# Altium PCB snes_exp_bridge.PcbDoc
Units mm, origin at the board's own origin, x right, y up, seen from the top; angles counter-clockwise.
Board outline 72.33 x 68.3 mm, 2 copper layers (Top Layer, Bottom Layer), stack 1.58 mm thick; 4 components, 28 nets, 66 pads, 24 vias.
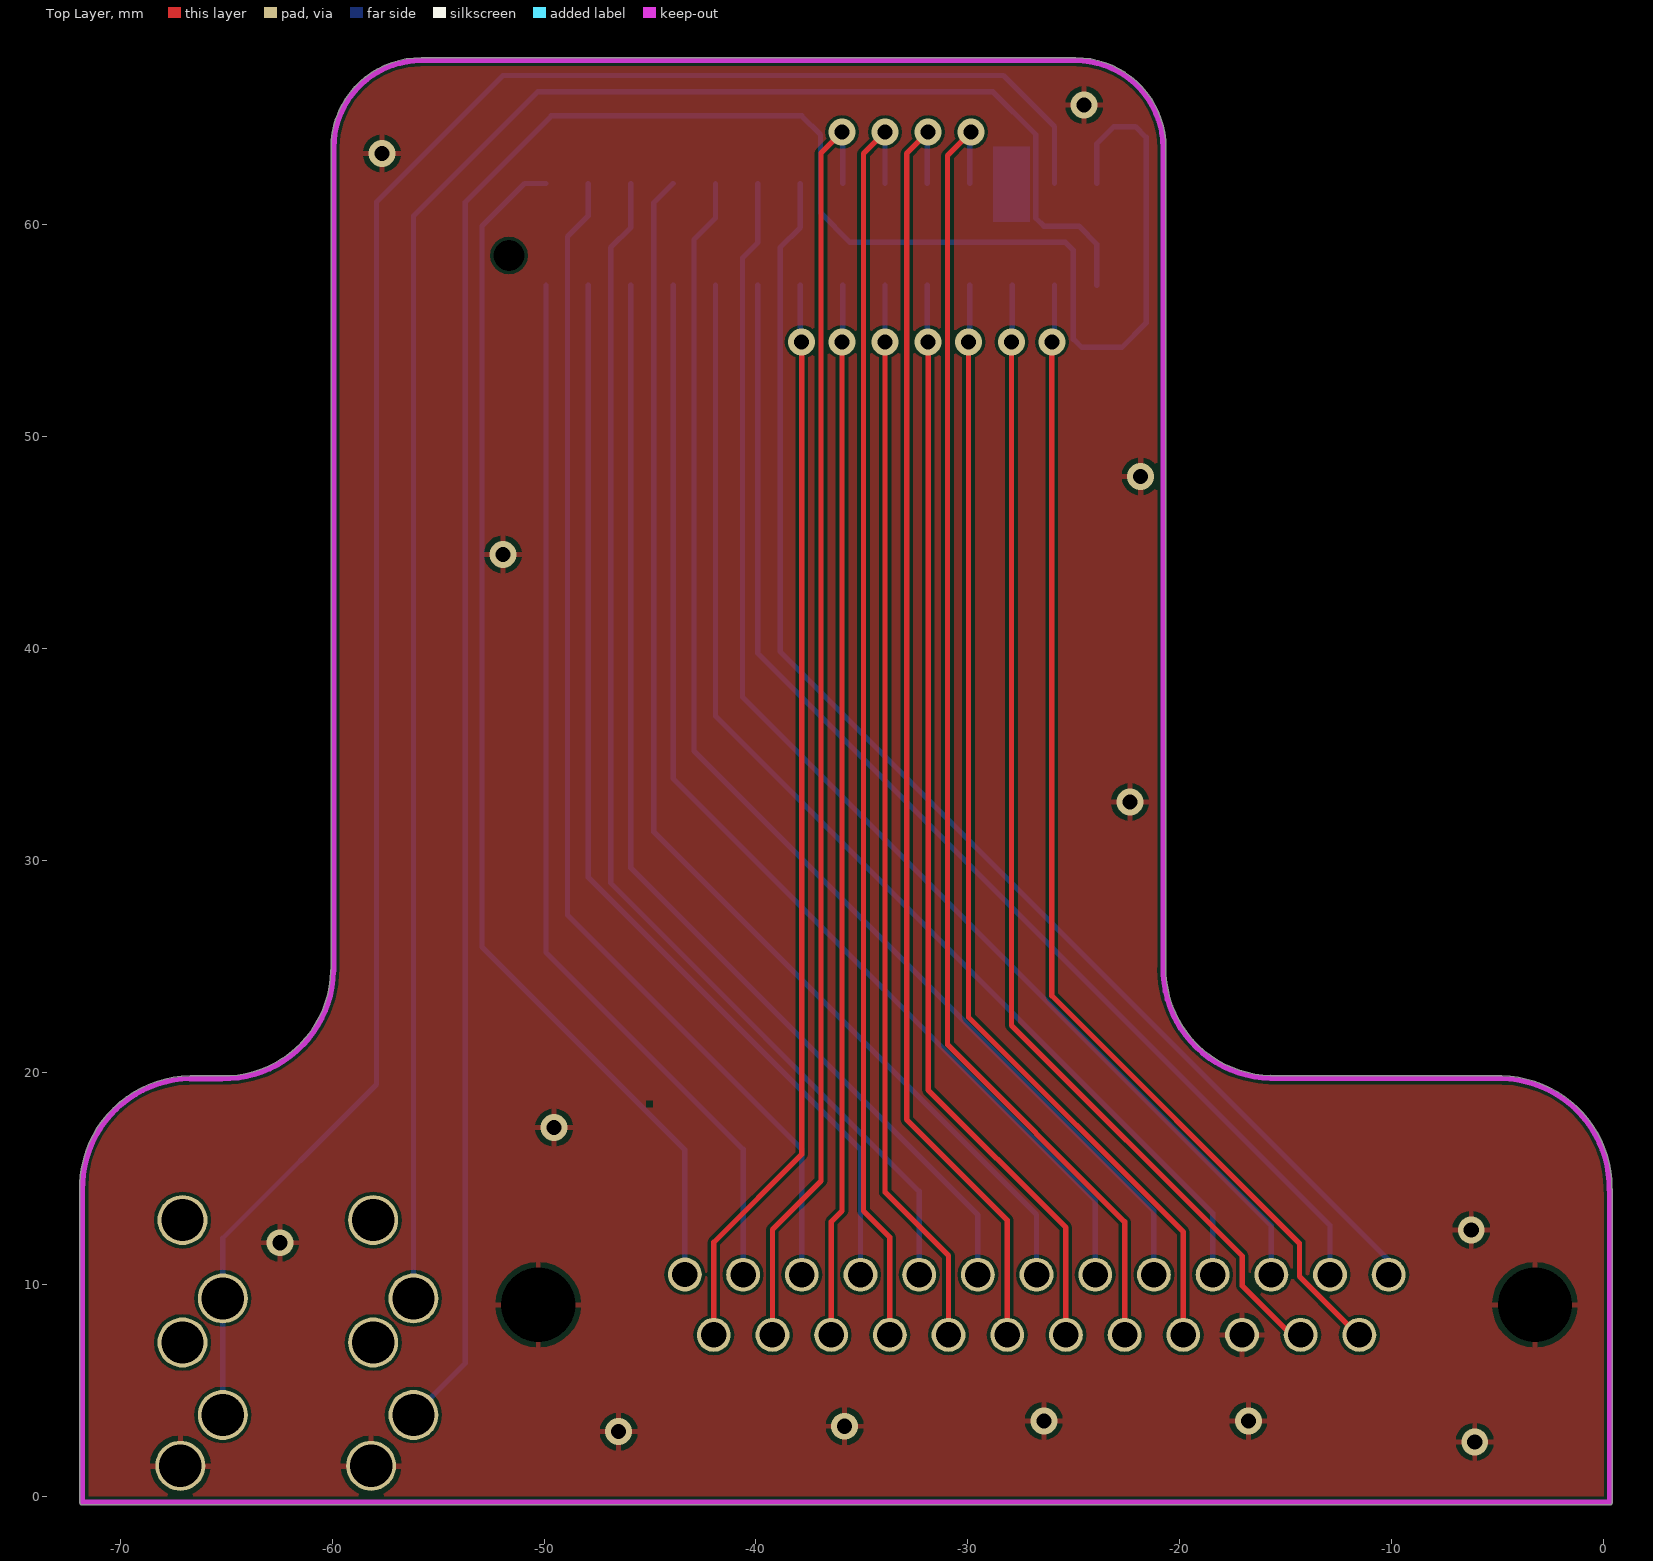
[diagram p0: Top Layer view]
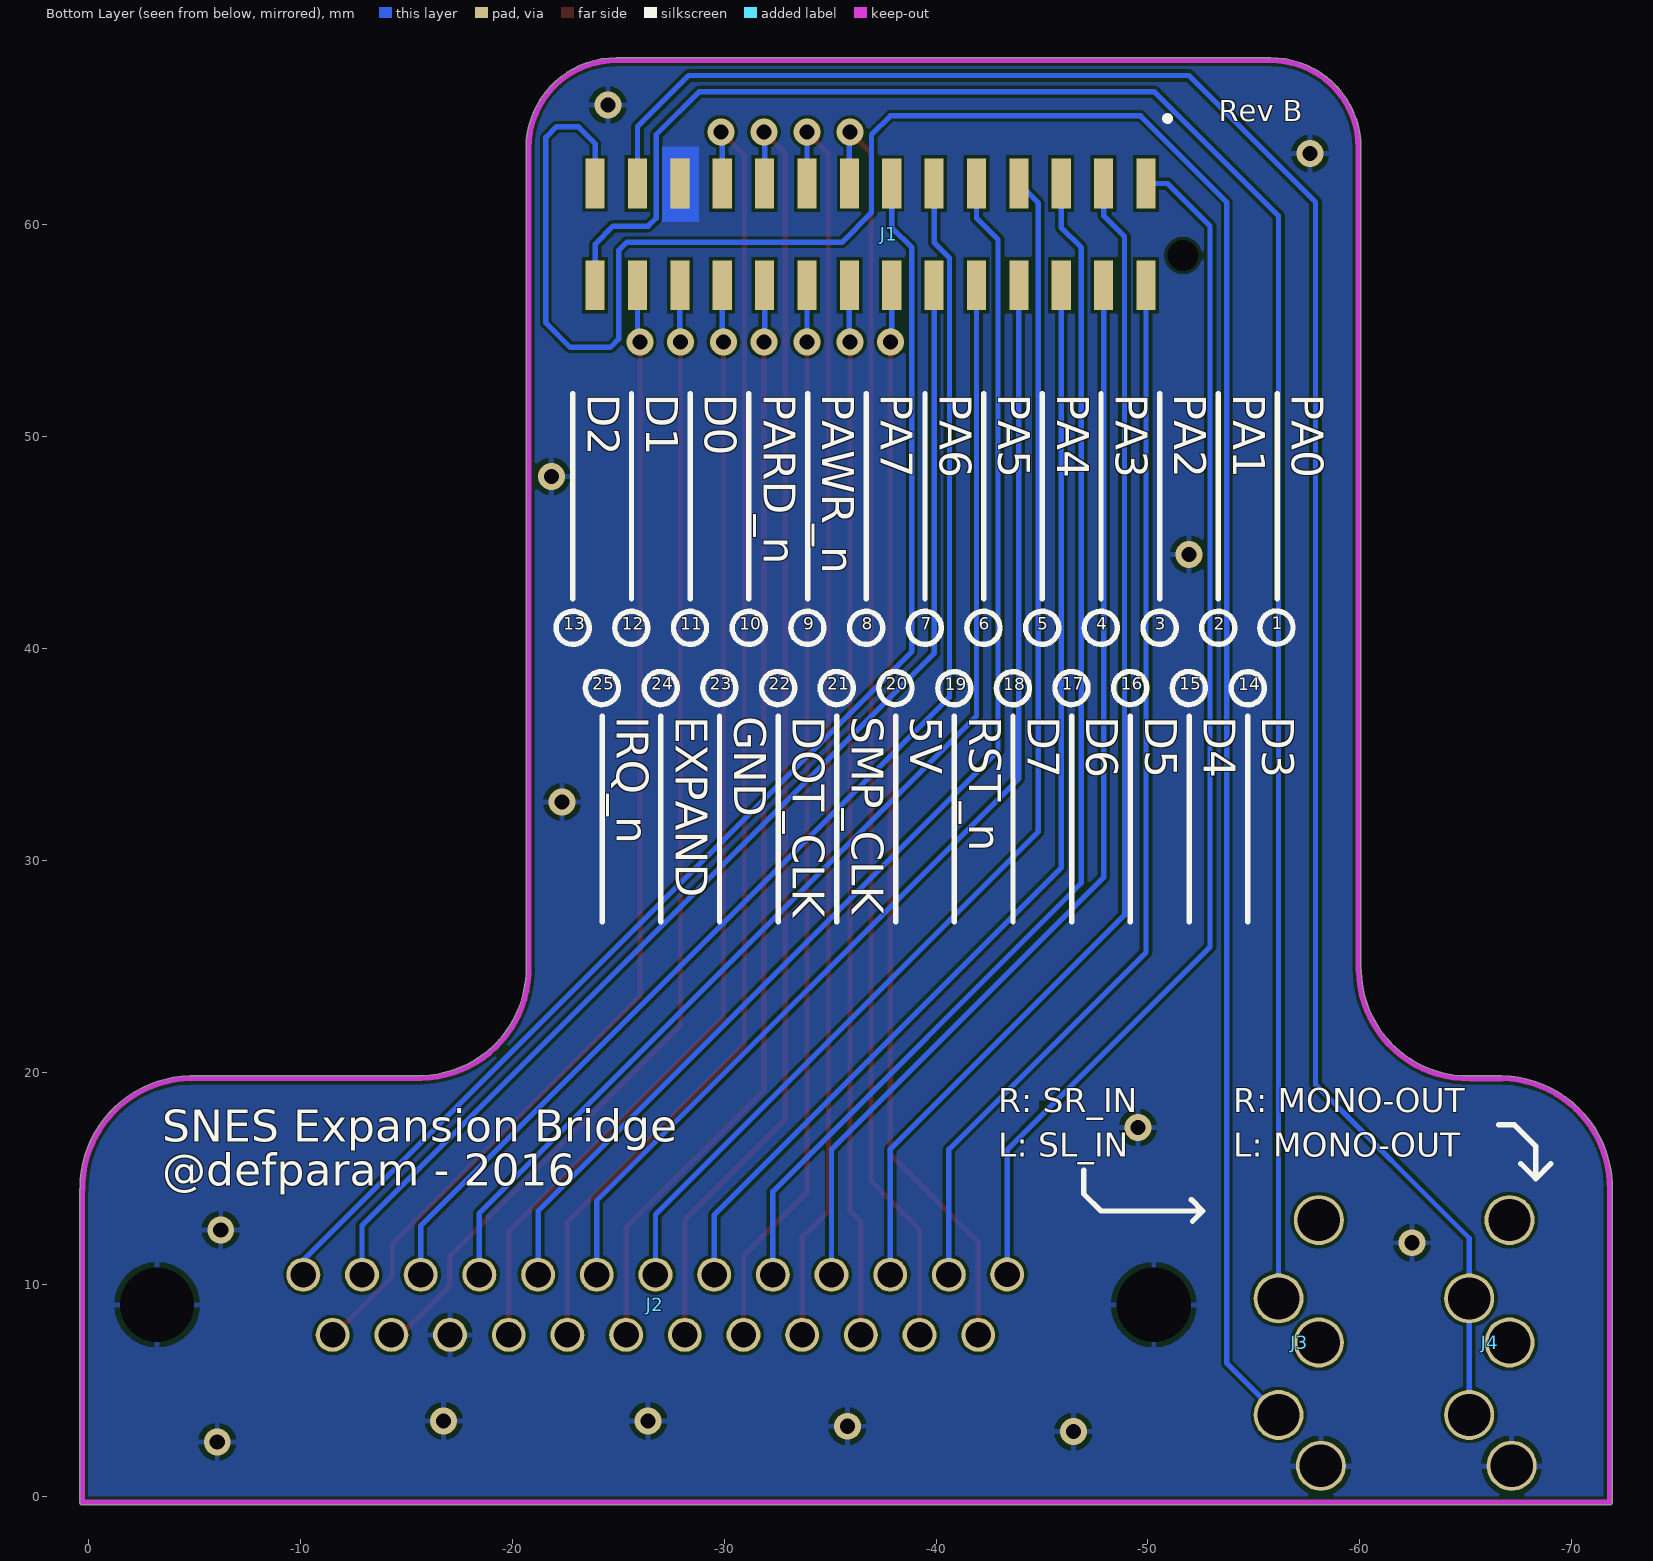
[diagram p1: Bottom Layer view, seen from below]
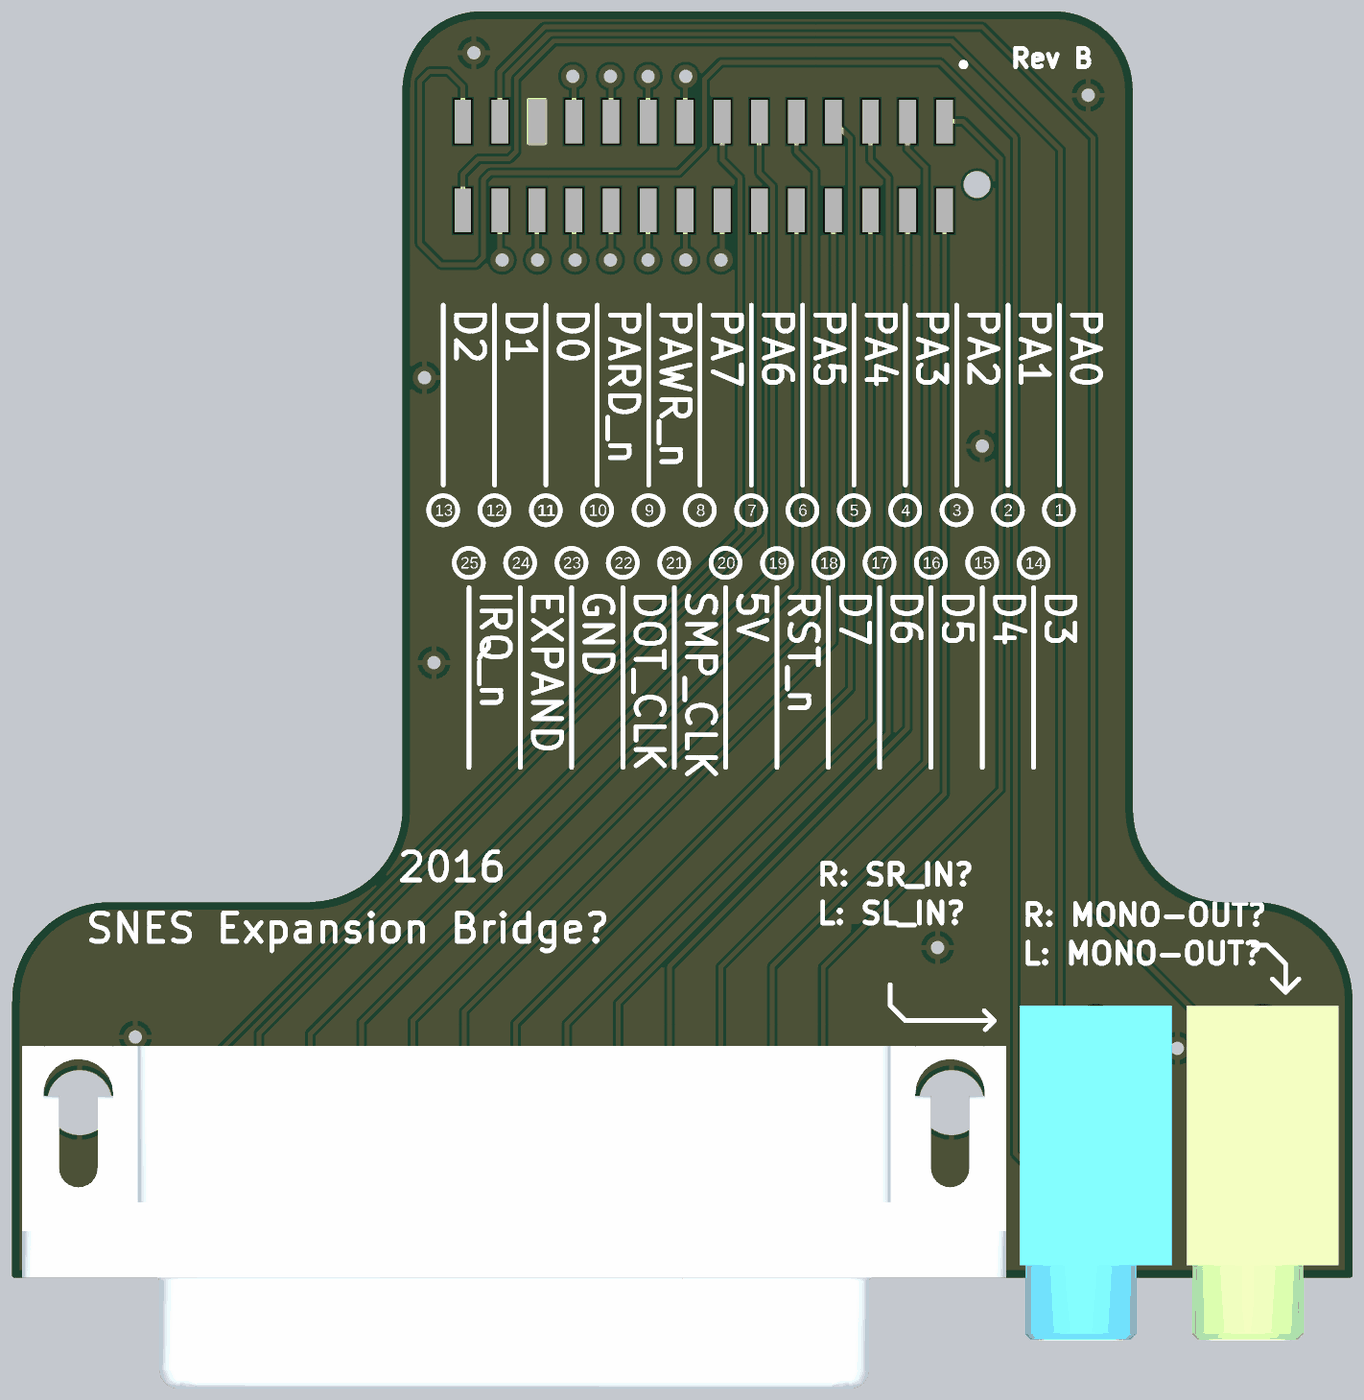
[diagram p2: 3D render of the assembled board from below, using the file's embedded part models]

## Layer stack, top to bottom
Top Solder: solder mask 0.0102, Solder Resist, Dk 3.5
Top Layer: signal copper 0.0356
Dielectric 1: dielectric 1.5088, FR-4, Dk 4.8
Bottom Layer: signal copper 0.0356
Bottom Solder: solder mask 0.0102, Solder Resist, Dk 3.5

## Board outline
-71.916,-0.285 -71.916,14.451 ccw(c-66.617,14.544) -71.916,14.45 -71.916,14.451 cw(c-66.617,14.544) -71.916,14.636 -71.916,14.715 cw(c-71.788,14.715) -71.913,14.742 cw(c-66.617,14.544) -66.711,19.842 cw(c-66.708,19.715) -66.673,19.838 -65.21,19.838 cw(c-65.21,19.71) -65.207,19.837 ccw(c-65.118,24.882) -60.074,24.792 cw(c-59.947,24.79) -60.054,24.859 -60.054,63.647 cw(c-55.809,63.647) -55.809,67.892 -24.908,67.892 cw(c-24.908,63.642) -20.658,63.642 -20.658,24.993 ccw(c-20.785,24.993) -20.658,24.995 -20.658,24.993 cw(c-20.785,24.993) -20.658,24.991 ccw(c-15.614,24.902) -15.703,19.858 cw(c-15.705,19.731) -15.645,19.843 -4.809,19.843 cw(c-4.809,19.715) -4.806,19.842 cw(c-4.9,14.544) 0.4,14.544 cw(c-4.9,14.544) 0.399,14.508 cw(c0.285,14.452) 0.412,14.452 0.412,-0.285 cw(c0.285,-0.285) 0.285,-0.412 -71.788,-0.412 cw(c-71.788,-0.285)

## Design rules (kind name [scope] priority, off if disabled: settings)
AssemblyTestPointUsage SilkToBoardRegionClearance_1 [All] p2:
AssemblyTestPointUsage SilkToBoardRegionClearance_2 [All] p3:
Clearance [All] p1: gap=0.152
HoleSize [All] p1: absolutevalues=TRUE maxlimit=6.35 minlimit=0.3 maxpercent=80.000 minpercent=20.000
MatchedLengths DiffPair_DIFF100MatchedLengths [InDifferentialPairClass('DIFF100')] p1: tolerance=0.152 checknetsindiffpair=TRUE checkdiffpairvsdiffpair=FALSE checkxsignals=FALSE checkothers=FALSE
MinimumSolderMaskSliver [All] p1: minsoldermaskwidth=0.1
MinimumSolderMaskSliver SilkscreenOverComponentPads_2 [All] p2: minsoldermaskwidth=0.254
MinimumSolderMaskSliver SilkToSolderMaskClearance_1 [IsPad] p3: minsoldermaskwidth=0.254
MinimumSolderMaskSliver SilkscreenOverComponentPads_1 [All] p4: minsoldermaskwidth=0.254
MinimumSolderMaskSliver SilkToSolderMaskClearance [IsPad] p5: minsoldermaskwidth=0.254
MinimumSolderMaskSliver SilkscreenOverComponentPads [All] p6: minsoldermaskwidth=0.254
PolygonConnect [All] p1: connectstyle=Direct reliefconductorwidth=0.254 reliefentries=4 polygonreliefangle="90 Angle" airgapwidth=0.254
RoutingVias [All] p1: holewidth=0.305 width=0.635 viastyle="Through Hole" minholewidth=0.305 minwidth=0.635 maxholewidth=0.711 maxwidth=1.27
SilkToSolderMaskClearance SilkToSolderMaskClearance_2 [IsPad] p1: minsilkscreentomaskgap=0.254 clearancetoexposedcopper=TRUE
SolderMaskExpansion [All] p1: expansion=0.102
Width [All] p1: maxlimit=2.54 minlimit=0.152 preferedwidth=0.254
27 further rules are at their usual default settings.

## Components (designator, comment, footprint, x,y, rotation, side; value= is the part's Value field where it differs from the comment)
J1 "SNESConn" SNES-MEC2-CONN -22.16,59.555 r180 top
J2 "TE_conn_DB_25" DB-25_RA_FSCK -7.359,33.965 r180 bottom
J3 "sj1-3535ng-be" SJ1-3535NG-BE -58.167,1.436 r90 bottom
J4 "sj1-3535ng-gr" SJ1-3535NG-GR -67.167,1.436 r90 bottom

## Footprints (in the part's own frame and the unit in brackets; to place one, negate y for a bottom-side part, rotate by r counter-clockwise, add the part's x,y. Pads: shape width x height; smd on the part's side, far side on the other; paste and mask are expansions set on the pad)
DB-25_RA_FSCK [mm]
  round 1.6 hole 1.2: 1(36,-23.5) 2(33.25,-23.51) 3(30.48,-23.51) 4(27.71,-23.51) 5(24.94,-23.51) 6(22.17,-23.51) 7(19.4,-23.51) 8(16.63,-23.51) 9(13.86,-23.51) 10(11.09,-23.51) 11(8.32,-23.51) 12(5.55,-23.51) 13(2.78,-23.51) 14(34.635,-26.35) 15(31.865,-26.35) 16(29.095,-26.35) 17(26.325,-26.35) 18(23.555,-26.35) 19(20.785,-26.35) 20(18.015,-26.35) 21(15.245,-26.35) 22(12.475,-26.35) 23(9.705,-26.35) 24(6.935,-26.35) 25(4.165,-26.35)
  round 1.524 hole 3.5: ""(-4.12,-24.93) ""(42.92,-24.93)
  body extent -7.22,-40.36 45.88,-21.86, height 12.75
SJ1-3535NG-BE [mm]
  round 2.36 hole 2: 1(0,0) 2(2.4,2) 3(7.9,2) 4(11.6,0.1) 5(5.821,0.1)
  body extent -5.22,-4 12.83,4.2, height 12.4
SJ1-3535NG-GR [mm]
  round 2.36 hole 2: 1(0,0) 2(2.4,2) 3(7.9,2) 4(11.6,0.1) 5(5.821,0.1)
  body extent -5.22,-4 12.83,4.2, height 12.4
SNES-MEC2-CONN [mm] "Male connector for the EXT socket on the SNES"
  rect 0.9x2.35 smd far side: 1(27.75,-2.4) 2(27.75,2.4) 3(25.75,-2.4) 4(25.75,2.4) 5(23.75,-2.4) 6(23.75,2.4) 7(21.75,-2.4) 8(21.75,2.4) 9(19.75,-2.4) 10(19.75,2.4) 11(17.75,-2.4) 12(17.75,2.4) 13(15.75,-2.4) 14(15.75,2.4) 15(13.75,-2.4) 16(13.75,2.4) 17(11.75,-2.4) 18(11.75,2.4) 19(9.75,-2.4) 20(9.75,2.4) 21(7.75,-2.4) 22(7.75,2.4) 23(5.75,-2.4) 24(5.75,2.4) 25(3.75,-2.4) 26(3.75,2.4) 27(1.75,-2.4) 28(1.75,2.4)
  round 0 hole 1.45: ""(29.5,1)
  body extent 1.3,-2.58 30.4,2.58, height 5

## Via types
v1: diameter 1.27, hole 0.711, Top Layer to Bottom Layer, tented both sides, 24 vias

## Nets (pads, with @x,y where several pads share a name; then routed paths per layer and width w, separated by ;. In a path a pad name is that pad's centre, name@x,y a point inside that pad or via, vN(x,y) a via of type N, cw(c..) or ccw(c..) an arc to the next point about the centre after c; other vN are vias at no path point)
5V: J1.20 J2.20 | length 52.2
  Top Layer w0.254: v1(-31.877,54.483) -31.877,19.177 -25.374,12.674 J2.20
  Bottom Layer w0.254: J1.20 -31.91,54.516 v1(-31.877,54.483)
D0: J1.11 J2.11 | length 62.1
  Bottom Layer w0.254: J1.11 -39.91,59.175 -40.639,58.446 -40.639,37.718 -15.679,12.758 J2.11
D1: J1.12 J2.12 | length 57.9
  Bottom Layer w0.254: J1.12 -39.91,39.783 -12.909,12.782 J2.12
D2: J1.13 J2.13 | length 63.8
  Bottom Layer w0.254: J1.13 -37.91,59.88 -38.862,58.928 -38.862,39.878 -10.139,11.155 J2.13
D3: J1.14 J2.14 | length 51.3
  Top Layer w0.254: J2.14 -41.994,11.981 -37.846,16.129 v1(-37.846,54.483)
  Bottom Layer w0.254: J1.14 -37.91,54.547 v1(-37.846,54.483)
D4: J1.15 J2.15 | length 60.6
  Top Layer w0.254: J2.15 -39.224,12.592 -36.932,14.884 -36.932,63.398 v1(-35.941,64.389)
  Bottom Layer w0.254: v1(-35.941,64.389) -35.91,64.358 J1.15
D5: J1.16 J2.16 | length 49.8
  Top Layer w0.254: J2.16 -36.454,12.949 -35.941,13.462 v1(-35.941,54.483)
  Bottom Layer w0.254: v1(-35.941,54.483) -35.91,54.514 J1.16
D6: J1.17 J2.17 | length 60.1
  Top Layer w0.254: v1(-33.909,64.389) -34.925,63.373 -34.925,13.462 -33.684,12.221 J2.17
  Bottom Layer w0.254: J1.17 v1(-33.909,64.389) v1(-33.909,64.389)
D7: J1.18 J2.18 | length 50.8
  Top Layer w0.254: v1(-33.909,54.483) -33.909,14.351 -30.914,11.356 J2.18
  Bottom Layer w0.254: v1(-33.909,54.483) v1(-33.909,54.483) J1.18
DOT_CLK: J1.22 J2.22 | length 53.8
  Top Layer w0.254: v1(-29.972,54.483) -29.972,22.606 -19.834,12.468 J2.22
  Bottom Layer w0.254: v1(-29.972,54.483) -29.91,54.545 J1.22
EXPAND: J1.24 J2.24 | length 55.5
  Top Layer w0.254: v1(-27.94,54.483) -27.94,22.225 -17.043,11.328 -17.043,9.931 -14.727,7.615 J2.24
  Bottom Layer w0.254: v1(-27.94,54.483) -27.91,54.513 J1.24
GND: J1.23 J2. J2.23 J3.1 J4.1
  other v1: -6.079,2.565 -46.482,3.048 -35.814,3.302 -26.416,3.556 -16.764,3.556 -62.467,11.963 -6.241,12.572 -49.53,17.399 -22.352,32.766 -51.943,44.45 -21.844,48.133 -57.658,63.373 -24.511,65.659
IRQ_N: J1.26 J2.25 | length 55.6
  Top Layer w0.254: v1(-26.035,54.483) -26.035,23.622 -14.351,11.938 -14.351,10.371 -11.595,7.615 J2.25
  Bottom Layer w0.254: v1(-26.035,54.483) -25.91,54.608 J1.26
MONO-OUT: J1.25 J4.2 J4.3 | length 98.4
  Bottom Layer w0.254: J4.2 J4.3 -65.167,12.176 -57.912,19.431 -57.912,61.087 -51.943,67.056 -28.321,67.056 -25.91,64.645 J1.25
PA0: J1.1 J2.1 | length 57.3
  Bottom Layer w0.254: J1.1 -50.922,61.955 -52.934,59.944 -52.934,25.926 -43.359,16.351 J2.1
PA1: J1.2 J2.2 | length 50.6
  Bottom Layer w0.254: J1.2 -49.91,25.672 -40.609,16.371 J2.2
PA2: J1.3 J2.3 | length 56.5
  Bottom Layer w0.254: J1.3 -47.91,60.443 -48.895,59.458 -48.895,27.427 -37.839,16.371 J2.3
PA3: J1.4 J2.4 | length 52
  Bottom Layer w0.254: J1.4 -47.91,29.212 -35.069,16.371 J2.4
PA4: J1.5 J2.5 | length 57.9
  Bottom Layer w0.254: J1.5 -45.91,59.881 -46.863,58.928 -46.863,28.956 -32.299,14.392 J2.5
PA5: J1.6 J2.6 | length 53.5
  Bottom Layer w0.254: J1.6 -45.91,29.654 -29.529,13.273 J2.6
PA6: J1.7 J2.7 | length 59.4
  Bottom Layer w0.254: J1.7 -44.831,61.034 -44.831,31.369 -26.759,13.297 J2.7
PA7: J1.8 J2.8 | length 55
  Bottom Layer w0.254: J1.8 -43.91,33.877 -23.989,13.956 J2.8
PARD_N: J1.10 J2.10 | length 56.4
  Bottom Layer w0.254: J1.10 -41.91,36.83 -18.449,13.369 J2.10
PAWR_N: J1.9 J2.9 | length 60.9
  Bottom Layer w0.254: J1.9 -41.91,60.325 -42.926,59.309 -42.926,35.179 -21.219,13.472 J2.9
RST_N: J1.19 J2.19 | length 61.6
  Top Layer w0.254: v1(-31.877,64.389) -32.893,63.373 -32.893,17.78 -28.144,13.031 J2.19
  Bottom Layer w0.254: J1.19 -31.91,64.356 v1(-31.877,64.389)
SL_IN: J1.27 J3.2 | length 115.2
  Bottom Layer w0.254: J3.2 -53.721,6.282 -53.721,61.087 -49.657,65.151 -37.846,65.151 -36.957,64.262 -36.957,60.579 -35.56,59.182 -25.4,59.182 -25.019,58.801 -25.019,54.61 -24.638,54.229 -22.733,54.229 -21.59,55.372 -21.59,64.135 -22.098,64.643 -23.114,64.643 -23.91,63.847 J1.27
SMP_CLK: J1.21 J2.21 | length 63.2
  Top Layer w0.254: v1(-29.845,64.389) -30.963,63.271 -30.963,21.311 -22.604,12.952 J2.21
  Bottom Layer w0.254: J1.21 -29.91,64.324 v1(-29.845,64.389)
SR_IN: J1.28 J3.3 | length 93
  Bottom Layer w0.254: J3.3 -56.167,60.419 -50.292,66.294 -28.829,66.294 -26.797,64.262 -26.797,60.325 -26.416,59.944 -24.765,59.944 -23.91,59.089 J1.28
pads on no net: J1. J3.4 J3.5 J4.4 J4.5

## Polygon pours and split planes (outlines as drawn)
GND on Top Layer "GND_L01_P002" (solid, pour order 2): -71.916,-0.285 -71.916,14.451 ccw(c-66.615,14.546) -71.916,14.45 -71.916,14.451 cw(c-66.617,14.544) -71.916,14.636 -71.916,14.715 cw(c-71.788,14.715) -71.913,14.742 cw(c-66.617,14.544) -66.711,19.842 cw(c-66.708,19.715) -66.673,19.838 -65.21,19.838 cw(c-65.21,19.71) -65.207,19.837 ccw(c-65.118,24.882) -60.074,24.792 cw(c-59.947,24.79) -60.054,24.859 -60.054,63.647 cw(c-55.809,63.647) -55.809,67.892 -24.908,67.892 cw(c-24.908,63.642) -20.658,63.642 -20.658,24.993 ccw(c-20.785,24.993) -20.658,24.995 -20.658,24.993 cw(c-20.785,24.993) -20.658,24.991 ccw(c-15.614,24.902) -15.703,19.858 cw(c-15.705,19.731) -15.645,19.843 -4.809,19.843 cw(c-4.809,19.715) -4.806,19.842 cw(c-4.9,14.544) 0.4,14.544 cw(c-4.9,14.544) 0.399,14.508 cw(c0.285,14.452) 0.412,14.452 0.412,-0.285 cw(c0.285,-0.285) 0.285,-0.412 -71.788,-0.412 cw(c-71.788,-0.285)
GND on Bottom Layer "GND_L02_P003" (solid, pour order 3): -71.916,-0.285 -71.916,14.451 ccw(c-66.615,14.546) -71.916,14.45 -71.916,14.451 cw(c-66.617,14.544) -71.916,14.636 -71.916,14.715 cw(c-71.788,14.715) -71.913,14.742 cw(c-66.617,14.544) -66.711,19.842 cw(c-66.708,19.715) -66.673,19.838 -65.21,19.838 cw(c-65.21,19.71) -65.207,19.837 ccw(c-65.118,24.882) -60.074,24.792 cw(c-59.947,24.79) -60.054,24.859 -60.054,63.647 cw(c-55.809,63.647) -55.809,67.892 -24.908,67.892 cw(c-24.908,63.642) -20.658,63.642 -20.658,24.993 ccw(c-20.785,24.993) -20.658,24.995 -20.658,24.993 cw(c-20.785,24.993) -20.658,24.991 ccw(c-15.614,24.902) -15.703,19.858 cw(c-15.705,19.731) -15.645,19.843 -4.809,19.843 cw(c-4.809,19.715) -4.806,19.842 cw(c-4.9,14.544) 0.4,14.544 cw(c-4.9,14.544) 0.399,14.508 cw(c0.285,14.452) 0.412,14.452 0.412,-0.285 cw(c0.285,-0.285) 0.285,-0.412 -71.788,-0.412 cw(c-71.788,-0.285)

## Keep-outs
Keep-Out Layer:
  lines w0.254: -71.788,14.452 cw(c-66.617,14.544) -66.708,19.715 ; -71.788,14.715 -71.788,-0.285 -70.788,-0.285 0.285,-0.285 0.285,14.452 ; -66.703,19.71 -65.21,19.71 ccw(c-65.118,24.882) -59.947,24.79 ; -59.927,24.79 -59.927,63.647 cw(c-55.809,63.647) -55.809,67.765 -55.338,67.765 -24.908,67.765 cw(c-24.908,63.642) -20.785,63.642 -20.785,24.993 ccw(c-15.614,24.902) -15.705,19.731 ; -15.705,19.715 -4.809,19.715 cw(c-4.9,14.544) 0.271,14.452

## Other copper
Bottom Layer:
  rectangle net GND: -28.804,60.147 -27.076,63.703
Multi-Layer:

## Silkscreen, mask and mechanical layers (free items; w line width, h text height)
Bottom Overlay:
  circle w0.254: c-50.927,65.024 r0.127
  circle w0.254: c-27.006,38.147 r0.782
  circle w0.254: c-56.071,40.997 r0.782
  circle w0.254: c-54.714,38.135 r0.782
  circle w0.254: c-53.321,40.987 r0.782
  circle w0.254: c-51.936,38.147 r0.782
  circle w0.254: c-50.551,40.987 r0.782
  circle w0.254: c-49.166,38.147 r0.782
  circle w0.254: c-47.781,40.987 r0.782
  circle w0.254: c-46.396,38.147 r0.782
  circle w0.254: c-45.011,40.987 r0.782
  circle w0.254: c-43.634,38.135 r0.782
  circle w0.254: c-42.241,40.987 r0.782
  circle w0.254: c-40.864,38.135 r0.782
  circle w0.254: c-39.471,40.987 r0.782
  circle w0.254: c-38.086,38.147 r0.782
  circle w0.254: c-36.701,40.987 r0.782
  circle w0.254: c-35.316,38.147 r0.782
  circle w0.254: c-33.931,40.987 r0.782
  circle w0.254: c-32.546,38.147 r0.782
  circle w0.254: c-31.161,40.987 r0.782
  circle w0.254: c-29.776,38.147 r0.782
  circle w0.254: c-28.391,40.987 r0.782
  circle w0.254: c-25.621,40.987 r0.782
  circle w0.254: c-24.236,38.147 r0.782
  circle w0.254: c-22.851,40.987 r0.782
  lines w0.254: -69.02,15.697 -68.309,14.986 ; -67.597,15.697 -68.309,14.986 ; -66.556,17.526 -67.293,17.526 -68.309,16.51 -68.309,14.986 ; -56.099,42.35 -56.099,52.045 ; -54.714,27.115 -54.714,36.81 ; -53.329,42.35 -53.329,52.045 ; -52.103,12.979 -52.586,13.462 ; -52.053,13.995 -52.586,13.462 ; -51.944,27.115 -51.944,36.81 ; -50.559,42.35 -50.559,52.045 ; -49.174,27.115 -49.174,36.81 ; -47.789,42.35 -47.789,52.045 ; -46.973,15.392 -46.973,14.275 -47.785,13.462 -52.586,13.462 ; -46.404,27.115 -46.404,36.81 ; -45.019,42.35 -45.019,52.045 ; -43.634,27.115 -43.634,36.81 ; -42.249,42.35 -42.249,52.045 ; -40.864,27.115 -40.864,36.81 ; -39.479,42.35 -39.479,52.045 ; -38.094,27.115 -38.094,36.81 ; -36.709,42.35 -36.709,52.045 ; -35.324,27.115 -35.324,36.81 ; -33.939,42.35 -33.939,52.045 ; -32.554,27.115 -32.554,36.81 ; -31.169,42.35 -31.169,52.045 ; -29.784,27.115 -29.784,36.81 ; -28.399,42.35 -28.399,52.045 ; -27.014,27.115 -27.014,36.81 ; -25.629,42.35 -25.629,52.045 ; -24.244,27.115 -24.244,36.81 ; -22.859,42.35 -22.859,52.045
  text "Rev B" at -53.34,64.897 h1
  text "PA0" at -56.794,52.044 h1.52 r90
  text "PA1" at -54.024,52.044 h1.52 r90
  text "PA2" at -51.254,52.044 h1.52 r90
  text "PA3" at -48.484,52.044 h1.52 r90
  text "PA4" at -45.714,52.044 h1.52 r90
  text "PA5" at -42.944,52.044 h1.52 r90
  text "PA6" at -40.174,52.044 h1.52 r90
  text "PA7" at -37.404,52.044 h1.52 r90
  text "PAWR_n" at -34.634,52.044 h1.52 r90
  text "PARD_n" at -31.864,52.044 h1.52 r90
  text "D0" at -29.094,52.044 h1.52 r90
  text "D1" at -26.324,52.044 h1.52 r90
  text "D2" at -23.554,52.044 h1.52 r90
  text "1" at -55.85,40.697 h1
  text "2" at -53.1,40.687 h1
  text "3" at -50.33,40.687 h1
  text "4" at -47.56,40.687 h1
  text "5" at -44.79,40.687 h1
  text "6" at -42.02,40.687 h1
  text "7" at -39.275,40.687 h1
  text "8" at -36.505,40.687 h1
  text "9" at -33.735,40.687 h1
  text "10" at -30.711,40.687 h1
  text "11" at -27.941,40.687 h1
  text "12" at -25.171,40.687 h1
  text "13" at -22.401,40.687 h1
  text "14" at -54.264,37.835 h1
  text "15" at -51.486,37.847 h1
  text "16" at -48.716,37.847 h1
  text "17" at -45.946,37.847 h1
  text "18" at -43.184,37.835 h1
  text "19" at -40.414,37.835 h1
  text "20" at -37.636,37.847 h1
  text "21" at -34.866,37.847 h1
  text "22" at -32.096,37.847 h1
  text "23" at -29.326,37.847 h1
  text "24" at -26.556,37.847 h1
  text "25" at -23.786,37.847 h1
  text "D3" at -55.409,36.809 h1.52 r90
  text "D4" at -52.639,36.809 h1.52 r90
  text "D5" at -49.869,36.809 h1.52 r90
  text "D6" at -47.099,36.809 h1.52 r90
  text "D7" at -44.329,36.809 h1.52 r90
  text "RST_n" at -41.559,36.809 h1.52 r90
  text "5V" at -38.789,36.809 h1.52 r90
  text "SMP_CLK" at -36.019,36.809 h1.52 r90
  text "DOT_CLK" at -33.249,36.809 h1.52 r90
  text "GND" at -30.479,36.809 h1.52 r90
  text "EXPAND" at -27.709,36.809 h1.52 r90
  text "IRQ_n" at -24.939,36.809 h1.52 r90
  text "R: MONO-OUT" at -54.024,18.112 h1.14
  text "R: SR_IN" at -42.944,18.112 h1.14
  text "SNES Expansion Bridge" at -3.471,16.727 h1.52
  text "L: MONO-OUT" at -54.024,16.034 h1.14
  text "L: SL_IN" at -42.944,16.034 h1.14
  text "@defparam - 2016" at -3.471,14.649 h1.52
Drill Drawing:
  text ".LEGEND" at 21.141,1.715 h1.52
  text "Drill Drawing." at 21.141,-5.285 h1.52